# Altium PCB proximal.PcbDoc
Units mil, origin at the board's own origin, x right, y up, seen from the top; angles counter-clockwise.
Board outline 655 x 1415 mil, 2 copper layers (Top Layer, Bottom Layer); 24 components, 22 nets, 140 pads, 33 vias.
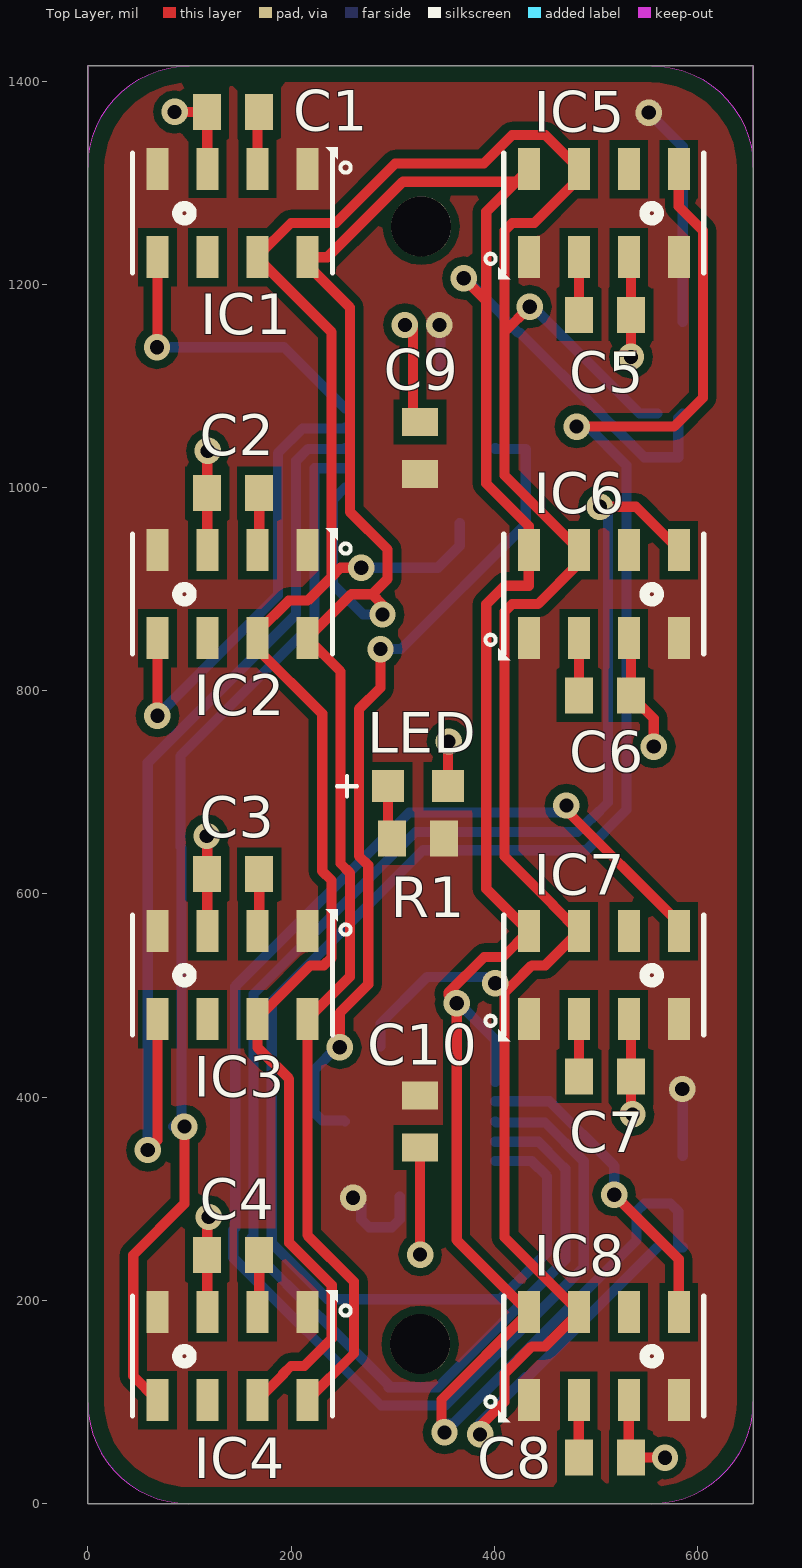
[diagram p0: Top Layer view]
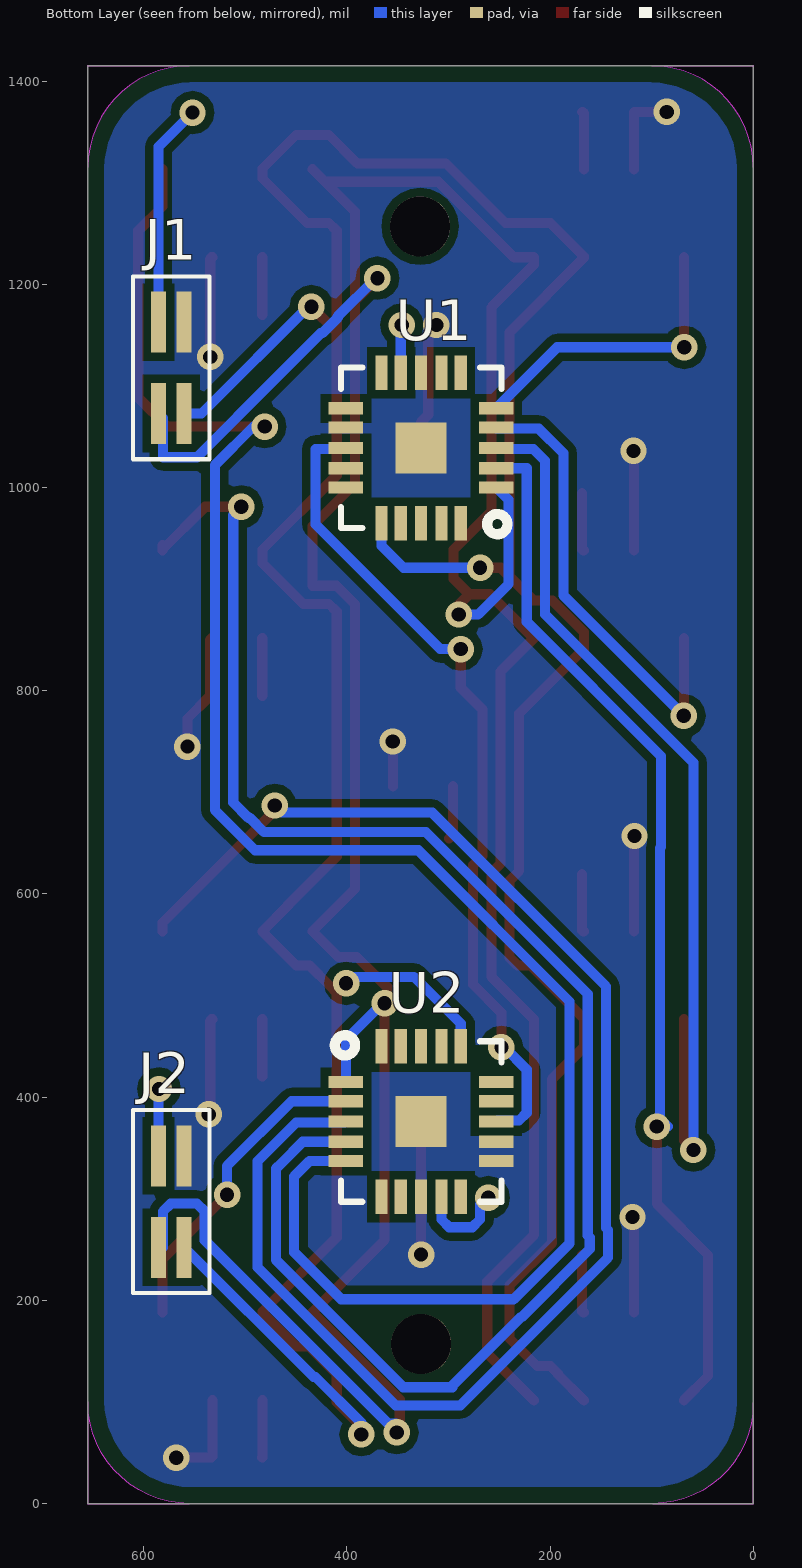
[diagram p1: Bottom Layer view, seen from below]

## Layer stack, top to bottom
Top Solder: solder mask 0.4, Solder Resist, Dk 3.5
Top Layer: signal copper 1.4
Dielectric 1: dielectric 12.6, FR-4, Dk 4.8
Bottom Layer: signal copper 1.4
Bottom Solder: solder mask 0.4, Solder Resist, Dk 3.5

## Board outline
0,0 655,0 655,1415 0,1415
cut-out: 0,99 ccw(c99,99) 99,0 0,0
cut-out: 555,0 ccw(c555,100) 655,100 655,0
cut-out: 555,1415 cw(c555,1315) 655,1315 655,1415
cut-out: 0,1315 cw(c100,1315) 100,1415 0,1415

## Design rules (kind name [scope] priority, off if disabled: settings)
BoardOutlineClearance "SeeedStudio BoardOutlineClearance Conservative" [All] p1: gap=16 // SeeedStudio 07/2016
Clearance "SeeedStudio Clearance Conservative" [All] p1: gap=8 except(6: SMDPad-SMDPad) // SeeedStudio 07/2016
HoleSize "SeeedStudio HoleSize Conservative" [All] p1: absolutevalues=TRUE maxlimit=250 minlimit=12 maxpercent=80.000 minpercent=20.000 // SeeedStudio 07/2016
MinimumAnnularRing "SeeedStudio Annular Ring Conservative" [All] p1: minimumring=6 // SeeedStudio 07/2016
MinimumSolderMaskSliver "SeeedStudio MinimumSolderMaskSliver Conservative" [All] p1: minsoldermaskwidth=6 // SeeedStudio 07/2016
PolygonConnect [All] p1: connectstyle=Direct reliefconductorwidth=10 reliefentries=4 polygonreliefangle="90 Angle" airgapwidth=10
RoutingVias [All] p1: holewidth=14 width=26 viastyle="Through Hole" minholewidth=12 minwidth=22 maxholewidth=28 maxwidth=40
SilkToSolderMaskClearance [IsPad] p1: minsilkscreentomaskgap=7 clearancetoexposedcopper=TRUE
SolderMaskExpansion "SeeedStudio SolderMaskExpansion Conservative" [All] p1: expansion=4 // SeeedStudio 07/2016
Width "GND Width" [InNet('GND')] p1: maxlimit=30 minlimit=6 preferedwidth=10
Width "VCC Width" [InNet('VCC')] p2: maxlimit=30 minlimit=6 preferedwidth=10
Width "SeeedStudio Width Conservative" [All] p3: maxlimit=20 minlimit=6 preferedwidth=10 // SeeedStudio 07/2016
27 further rules are at their usual default settings.

## Components (designator, comment, footprint, x,y, rotation, side; value= is the part's Value field where it differs from the comment)
C1 "1uF" C0402 143,1369.7 r180 top
C2 "1uF" C0402 143,994.7 r180 top
C3 "1uF" C0402 143,619.7 r180 top
C4 "1uF" C0402 143,244.7 r180 top
C5 "1uF" C0402 509,1170 r0 top
C6 "1uF" C0402 509,795.1 r0 top
C7 "1uF" C0402 509,420.2 r0 top
C8 "1uF" C0402 509,45.29 r0 top
C9 "4.7uF" C0402 327,1039 r90 top
C10 "4.7uF" C0402 327,376 r270 top
IC1 "MPL115A2_I" MPL115A2 95,1270 r270 top
IC2 "MPL115A2_I" MPL115A2 95,895 r270 top
IC3 "MPL115A2_I" MPL115A2 95,520 r270 top
IC4 "MPL115A2_I" MPL115A2 95,145 r270 top
IC5 "MPL115A2_I" MPL115A2 555,1270 r90 top
IC6 "MPL115A2_I" MPL115A2 555,895 r90 top
IC7 "MPL115A2_I" MPL115A2 555,520 r90 top
IC8 "MPL115A2_I" MPL115A2 555,145 r90 top
J1 "PZN-04_I" PZN-04-VV 573,1117.8 r180 bottom
J2 "PZN-04_I" PZN-04-VV 573,297.2 r180 bottom
LED "LEDSML0603_I" SML0603 325,706 r180 top
R1 "120R" R0402 325,654.53 r0 top
U1 "ATTINY24A-MU-QFN20" QFN50P400X400X80-21N 327,1039 r0 bottom
U2 "ATTINY24A-MU-QFN20" QFN50P400X400X80-21N 327,376 r180 bottom

## Footprints (in the part's own frame and the unit in brackets; to place one, negate y for a bottom-side part, rotate by r counter-clockwise, add the part's x,y. Pads: shape width x height; smd on the part's side, far side on the other; paste and mask are expansions set on the pad)
C0402 [mm]
  rect 0.7x0.9 smd: 1(-0.65,0) 2(0.65,0)
MPL115A2 [mm]
  rect 1.05x0.55 smd: 1(-1.1,3.075) 2(-1.1,1.825) 3(-1.1,0.575) 4(-1.1,-0.675) 5(1.1,-0.675) 6(1.1,0.575) 7(1.1,1.825) 8(1.1,3.075)
  silkscreen extent -1.65,-1.3 1.5,4.16
PZN-04-VV [mil] "Omnetics Connector, PZN-04-VV - Imperial Units"
  rect 15x60 smd: 0(-12.5,45) 1(12.5,45) 2(-12.5,-45) 3(12.5,-45)
  silkscreen extent -38,-90 38,90
QFN50P400X400X80-21N [mil]
  rect 34x12 smd mask+4: 1(-74,39) 2(-74,20) 3(-74,0) 4(-74,-20) 5(-74,-39) 11(74,-39) 12(74,-20) 13(74,0) 14(74,20) 15(74,39)
  rect 12x34 smd mask+4: 6(-39,-74) 7(-20,-74) 8(0,-74) 9(20,-74) 10(39,-74) 16(39,74) 17(20,74) 18(0,74) 19(-20,74) 20(-39,74)
  rect 50x50 smd: 21(0,0)
  silkscreen extent -85,-79 79,85
R0402 [mm]
  rect 0.7x0.9 smd: 1(-0.65,0) 2(0.65,0)
SML0603 [mil]
  rect 31.5x31.5 smd: A(29.53,0) C(-29.53,0)
  silkscreen extent 60,-10 80,10

## Part data
C1 C2 C3 C4 C5 C6 C7 C8: library part C0402_I, "Capacitor - Imperial Units"
C9 C10: library part C-EUC0402, "CAPACITOR, European symbol"
IC1 IC2 IC3 IC4 IC5 IC6 IC7 IC8: "Barometer - Imperial Units"
J1 J2: "Omnetics PTN Connector 4 pins, Horizontal, Design 1 - Imperial Units"
LED: "LED   OSRAM: - CHIPLED LG R971, LG N971, LY N971, LG Q971, LY Q971, LO R971, LY R971 LH N974, LH R974 LS Q976, LO Q976, LY Q976 LO Q996 - Hyper CHIPLED LW Q18S LB Q993, LB Q99A, LB R99A - SideLED LS A670, LO A670, LY A670, LG A670, LP A670 LB A673, LV A673, LT A673, LW A673 LH A674 LY A675 LS A676, LA A676, LO A676, LY A676, LW A676 LS A679, LY A679, LG A679 -  Hyper Micro SIDELED® LS Y876, LA Y876, LO Y876, LY Y876 LT Y87S - SmartLED LW L88C, LW L88S LB L89C, LB L89S, LG L890 LS L89K, LO L89K, LY L89K LS L896, LA L896, LO L896, LY L896 - TOPLED LS T670, LO T670, LY T670, LG T670, LP T670 LSG T670, LSP T670, LSY T670, LOP T670, LYG T670 LG T671, LOG T671, LSG T671 LB T673, LV T673, LT T673, LW T673 LH T674 LS T676, LA T676, LO T676, LY T676, LB T676, LH T676, LSB T676, LW T676 LB T67C, LV T67C, LT T67C, LS T67K, LO T67K, LY T67K, LW E67C LS E67B, LA E67B, LO E67B, LY E67B, LB E67C, LV E67C, LT E67C LW T67C LS T679, LY T679, LG T679 LS T770, LO T770, LY T770, LG T770, LP T770 LB T773, LV T773, LT T773, LW T773 LH T774 LS E675, LA E675, LY E675, LS T675 LS T776, LA T776, LO T776, LY T776, LB T776 LHGB T686 LT T68C, LB T68C - Hyper Mini TOPLED® LB M676 - Mini TOPLED Santana® LG M470 LS M47K, LO M47K, LY M47K    Source: http://www.osram.convergy.de   LUXEON: - LUMILED® LXK2-PW12-R00, LXK2-PW12-S00, LXK2-PW14-U00, LXK2-PW14-V00 LXK2-PM12-R00, LXK2-PM12-S00, LXK2-PM14-U00 LXK2-PE12-Q00, LXK2-PE12-R00, LXK2-PE12-S00, LXK2-PE14-T00, LXK2-PE14-U00 LXK2-PB12-K00, LXK2-PB12-L00, LXK2-PB12-M00, LXK2-PB14-N00, LXK2-PB14-P00, LXK2-PB14-Q00 LXK2-PR12-L00, LXK2-PR12-M00, LXK2-PR14-Q00, LXK2-PR14-R00 LXK2-PD12-Q00, LXK2-PD12-R00, LXK2-PD12-S00 LXK2-PH12-R00, LXK2-PH12-S00 LXK2-PL12-P00, LXK2-PL12-Q00, LXK2-PL12-R00    Source: www.luxeon.com   KINGBRIGHT: KA-3528ASYC"
R1: library part R0402_I, "Resistor - Imperial Units"
U1 U2: library part ATTINY24A-MU_I, "Microcontroller - Imperial Units"

## Free pads (board coordinates)
  round 59 hole 59 unplated mask+0: 0(328,1257) 1(327,157)

## Via types
v1: diameter 26, hole 14, Top Layer to Bottom Layer, 33 vias

## Nets (pads, with @x,y where several pads share a name; then routed paths per layer and width w, separated by ;. In a path a pad name is that pad's centre, name@x,y a point inside that pad or via, vN(x,y) a via of type N, cw(c..) or ccw(c..) an arc to the next point about the centre after c; other vN are vias at no path point)
GND: C1.2 C2.2 C3.2 C4.2 C5.2 C6.2 C7.2 C8.2 C9.2 C10.2 IC1.3 IC2.3 IC3.3 IC4.3 IC5.3 IC6.3 IC7.3 IC8.3 J1.1 J2.1 LED.C U1.8 U1.12 U1.21 U2.8 U2.11 U2.12 U2.21 | length 1040.9
  Top Layer w10: v1(85.3,1369.7) C1.2 117.41,1313.31 IC1.3 ; v1(117,657) 117.41,656.59 C3.2 117.41,563.31 IC3.3 ; IC4.3 117.41,188.31 C4.2 117.41,283.59 v1(119,282) ; IC2.3 117.41,938.31 C2.2 117.41,1035.41 v1(118,1036) ; v1(312,1160) 318,1160 320,1162 320,1071.59 C9.2 ; v1(327,245) C10.2 ; LED.C 354.53,749.53 v1(355,750) ; IC8.3 532.36,47.52 ccw(c534.59,47.52) C8.2 567.71,45.29 v1(568,45) ; IC7.3 cw(c532.36,474.46) 534.59,474.46 C7.2 534.59,384.41 v1(536,383) ; IC6.3 cw(c532.36,849.46) 534.59,849.46 C6.2 557,772.69 v1(557,745) ; IC5.3 cw(c532.36,1224.46) 534.59,1224.46 C5.2 v1(534.59,1128.59)
NetC1_1: C1.1 IC1.2 | length 57.4
  Top Layer w10: IC1.2 166.85,1367.96 cw(c168.59,1367.96) C1.1
NetC2_1: C2.1 IC2.2 | length 57.4
  Top Layer w10: IC2.2 ccw(c166.85,940.05) 168.59,940.05 C2.1
NetC3_1: C3.1 IC3.2 | length 57.4
  Top Layer w10: IC3.2 ccw(c166.85,565.05) 168.59,565.05 C3.1
NetC4_1: C4.1 IC4.2 | length 57.4
  Top Layer w10: IC4.2 ccw(c166.85,190.05) 168.59,190.05 C4.1
NetC5_1: C5.1 IC5.2 | length 57
  Top Layer w10: IC5.2 483.41,1226.69 C5.1
NetC6_1: C6.1 IC6.2 | length 56.9
  Top Layer w10: IC6.2 483.41,851.69 C6.1
NetC7_1: C7.1 IC7.2 | length 56.8
  Top Layer w10: IC7.2 483.41,476.69 C7.1
NetC8_1: C8.1 IC8.2 | length 56.7
  Top Layer w10: IC8.2 483.15,45.29 C8.1
NetLED_A: LED.A R1.1 | length 53.1
  Top Layer w10: LED.A 295.47,658.47 R1.1
RESET: U1.13 U2.13 | length 825.3
  Top Layer w10: v1(248,449) 248,483.17 275.88,511.06 275.88,628.17 266.72,637.34 266.72,781.72 288,803 v1(288,841)
  Bottom Layer w10: v1(248,449) 245,449 223,427 223,384.62 230.62,377 252,377 U2.13 ; v1(288,841) 308.26,841 431,963.74 431,1038 401,1038 U1.13
RST01: IC1.5 U1.5 | length 299.6
  Top Layer w10: v1(68,1138) 68.43,1137.57 IC1.5
  Bottom Layer w10: v1(68,1138) 193,1138 U1.5
RST01_2: IC5.5 U2.5 | length 1885.2
  Top Layer w10: v1(481,1060) 577,1060 605.39,1088.39 605.39,1252.74 581.57,1276.57 IC5.5
  Bottom Layer w10: U2.5 437,337 452,322 452,247.35 405.65,201 236,201 180.84,256.16 181,256.32 181,494.09 329.91,643 490.46,643 530,682.54 530,1021.96 491.96,1060 v1(481,1060)
RST02: IC2.5 U1.4 | length 460.8
  Top Layer w10: v1(68.43,775.43) IC2.5
  Bottom Layer w10: v1(68.43,775.43) 187,894 187,1033.91 211.09,1058 253,1058 U1.4
RST02_2: IC6.5 U2.4 | length 1661.3
  Top Layer w10: v1(504,981) 539.55,981 IC6.5@581.57,938.98 ; IC6.5 IC6.5@581.57,938.98 ; IC6.5@581.57,943.43 IC6.5@581.57,938.98
  Bottom Layer w10: U2.4 443.46,356 464.23,335.23 470,329.46 470,239.9 344.6,114.5 296,114.5 296,116.4 229.4,183 228.54,183 161,250.54 161,261.77 163,263.77 163,501.54 322.46,661 481.77,661 495.77,675 497,675 512,690 512,973 v1(504,981)
RST03: IC3.5 U1.3 | length 925.5
  Top Layer w10: v1(59,347.92) 68.43,357.35 IC3.5
  Bottom Layer w10: v1(59,347.92) 59,729.23 205,875.23 205,1026.46 216.54,1038 253,1038 U1.3
RST03_2: IC7.5 U2.3 | length 1513.1
  Top Layer w10: v1(471,687) 466.16,687 581.57,571.6 IC7.5
  Bottom Layer w10: U2.3 402,375 449.91,375 488,336.91 488,232.44 352.06,96.5 288.54,96.5 143,242.04 143,269.23 145,271.23 145,509 316,680 464,680 v1(471,687)
RST04: IC4.5 U1.2 | length 1047.5
  Top Layer w10: IC4.5 44.61,125.52 44.61,244.61 95,295 v1(95,371)
  Bottom Layer w10: v1(95,371) 84,371 92,379 92,645.23 91,646.23 91,735.77 223,867.77 223,1019 U1.2
RST04_2: IC8.5 U2.2 | length 313.7
  Top Layer w10: v1(518,304) 581.57,240.43 IC8.5
  Bottom Layer w10: U2.2 454.37,396 518,332.37 v1(518,304)
SCL: IC1.8 IC2.8 IC3.8 IC4.8 IC5.8 IC6.8 IC7.8 IC8.8 J1.2 J2.2 U1.1 U2.1 | length 3979.6
  Top Layer w10: IC4.8 262,147.63 262,218.26 216.06,264.19 IC3.8 257.88,518.52 257.88,620.72 248.72,629.88 248.72,819.03 IC2.8 259.37,895 279.77,895 ; v1(290,875) 290,884.77 279.77,895 ; v1(351,70) 348,73 348,102.37 IC8.8 363,259.25 v1(363,492.37) 354.81,500.56 354.81,502.72 390.09,538 408.63,538 IC7.8 392.12,605.13 392.12,885.2 410.27,903.36 433.94,903.36 IC6.8 433.94,962.06 392.12,1003.88 392.12,1183.89 ; v1(370,1206) 392.12,1183.89 ; IC5.8 421.63,1301 ; 279.77,895 295,910.23 295,939 257.88,976.12 257.88,1177.35 216.06,1219.17 IC1.8 235.69,1226.69 310,1301 421.63,1301 ; 392.12,1183.89 392.12,1271.49 421.63,1301
  Bottom Layer w10: U1.1 241,988 241,904.91 270.91,875 v1(290,875) ; v1(351,70) 351,77.44 352.06,78.5 359.52,78.5 540,258.98 540,287.58 547.62,295.2 573.38,295.2 581,287.58 581,252.2 J2.2 ; v1(363,492.37) 365.01,492.37 401,456.38 U2.1 ; v1(370,1206) 371.42,1206 409,1168.42 409,1167.23 424.23,1152 425.77,1152 503.71,1074.06 507,1070.77 507,1070.42 509.96,1067.46 519,1058.42 547.62,1029.8 581,1029.8 581,1068.3 J1.2
SDA: IC1.7 IC2.7 IC3.7 IC4.7 IC5.7 IC6.7 IC7.7 IC8.7 J1.3 J2.3 U1.16 U2.16 | length 4021
  Top Layer w10: IC4.7 192.23,127.08 192.23,127.74 199.85,135.36 212.99,135.36 240,162.37 240,214.8 198.06,256.74 198.06,417.94 166.85,449.15 IC3.7 166.85,477.36 219.13,529.64 232.27,529.64 239.88,537.26 239.88,613.26 230.72,622.42 230.72,777.28 166.85,841.15 IC2.7 166.85,857.85 197.69,888.69 216.31,888.69 239.88,912.26 ; v1(269,921) 248.63,921 239.88,912.26 ; v1(386,68) 386,76 410.12,100.12 410.12,127.74 437.01,154.64 450.15,154.64 483.15,187.64 IC8.7 483.15,188.98 410.12,262.01 410.12,502.74 ; v1(400.86,512) 410.12,502.74 ; v1(435,1178) 410.12,1153.11 ; 239.88,912.26 239.88,1152.99 166.85,1226.02 IC1.7 166.85,1227.36 199.85,1260.36 243.9,1260.36 302.54,1319 389.75,1319 417.73,1346.98 450.15,1346.98 483.15,1313.98 IC5.7 483.15,1304.15 439.36,1260.36 417.73,1260.36 410.12,1252.74 410.12,1153.11 ; 410.12,502.74 417.73,510.36 437.01,529.64 450.15,529.64 483.15,562.64 IC7.7 457.77,588.69 457.77,589.36 410.12,637.01 410.12,877.74 417.73,885.36 443.19,885.36 483.15,925.32 IC6.7 483.15,938.98 410.12,1012.01 410.12,1153.11
  Bottom Layer w10: v1(269,921) 344.38,921 366,942.62 U1.16 ; U2.16 288,472.38 333.99,518.37 394.49,518.37 v1(400.86,512) ; v1(386,68) 386,79.53 431,124.53 432.83,124.53 J2.3 ; v1(435,1178) 435,1181 543.2,1072.8 J1.3
VCC: C9.1 C10.1 IC1.1 IC1.4 IC2.1 IC2.4 IC3.1 IC3.4 IC4.1 IC4.4 IC5.1 IC5.4 IC6.1 IC6.4 IC7.1 IC7.4 IC8.1 IC8.4 J1.0 J2.0 R1.2 U1.9 U2.9 | length 425.5
  Bottom Layer w10: v1(261,301) 262,301 269,294 269,279.62 276.62,272 299.38,272 307,279.62 U2.9 ; v1(346,1160) 347,1159 U1.9 ; v1(552,1369) 585.5,1335.5 J1.0 ; v1(585,408) 585.5,407.5 J2.0
pads on no net: IC1.6 IC2.6 IC3.6 IC4.6 IC5.6 IC6.6 IC7.6 IC8.6 U1.6 U1.7 U1.10 U1.11 U1.14 U1.15 U1.17 U1.18 U1.19 U1.20 U2.6 U2.7 U2.10 U2.14 U2.15 U2.17 U2.18 U2.19 U2.20

## Polygon pours and split planes (outlines as drawn)
VCC on Top Layer "VCC_Plane" (solid, pour order 0): 0,0 655,0 655,1415 0,1415
GND on Bottom Layer "GND_Plane" (solid, pour order 4): 0,0 655,0 655,1415 0,1415

## Silkscreen, mask and mechanical layers (free items; w line width, h text height)
Mechanical 1:
  lines w4: 0,100.15 ccw(c100.15,100.15) 29.33,29.33 30.15,28.52 ccw(c99,97.37) 99,0 553.84,0 ccw(c553.84,101.16) 625.37,29.63 ccw(c553.84,101.16) 655,101.16 655,1315 ccw(c556.64,1315) 626.19,1384.55 ccw(c552.67,1311.03) 552.67,1415 101.16,1415 ccw(c101.16,1313.84) 29.63,1385.37 28.81,1384.55 ccw(c98.36,1315) 0,1315 0,206 0,100.15